# Altium PCB SensorFusionV1.2.PcbDoc (part 2 of 2)
Units mil, origin at the board's own origin, x right, y up, seen from the top; angles counter-clockwise.
Board outline 6000 x 4000 mil, 4 copper layers (Component Side, Ground Plane, Power Plane, Solder Side), stack 33.234 mil thick; 137 components, 117 nets, 497 pads, 789 vias.
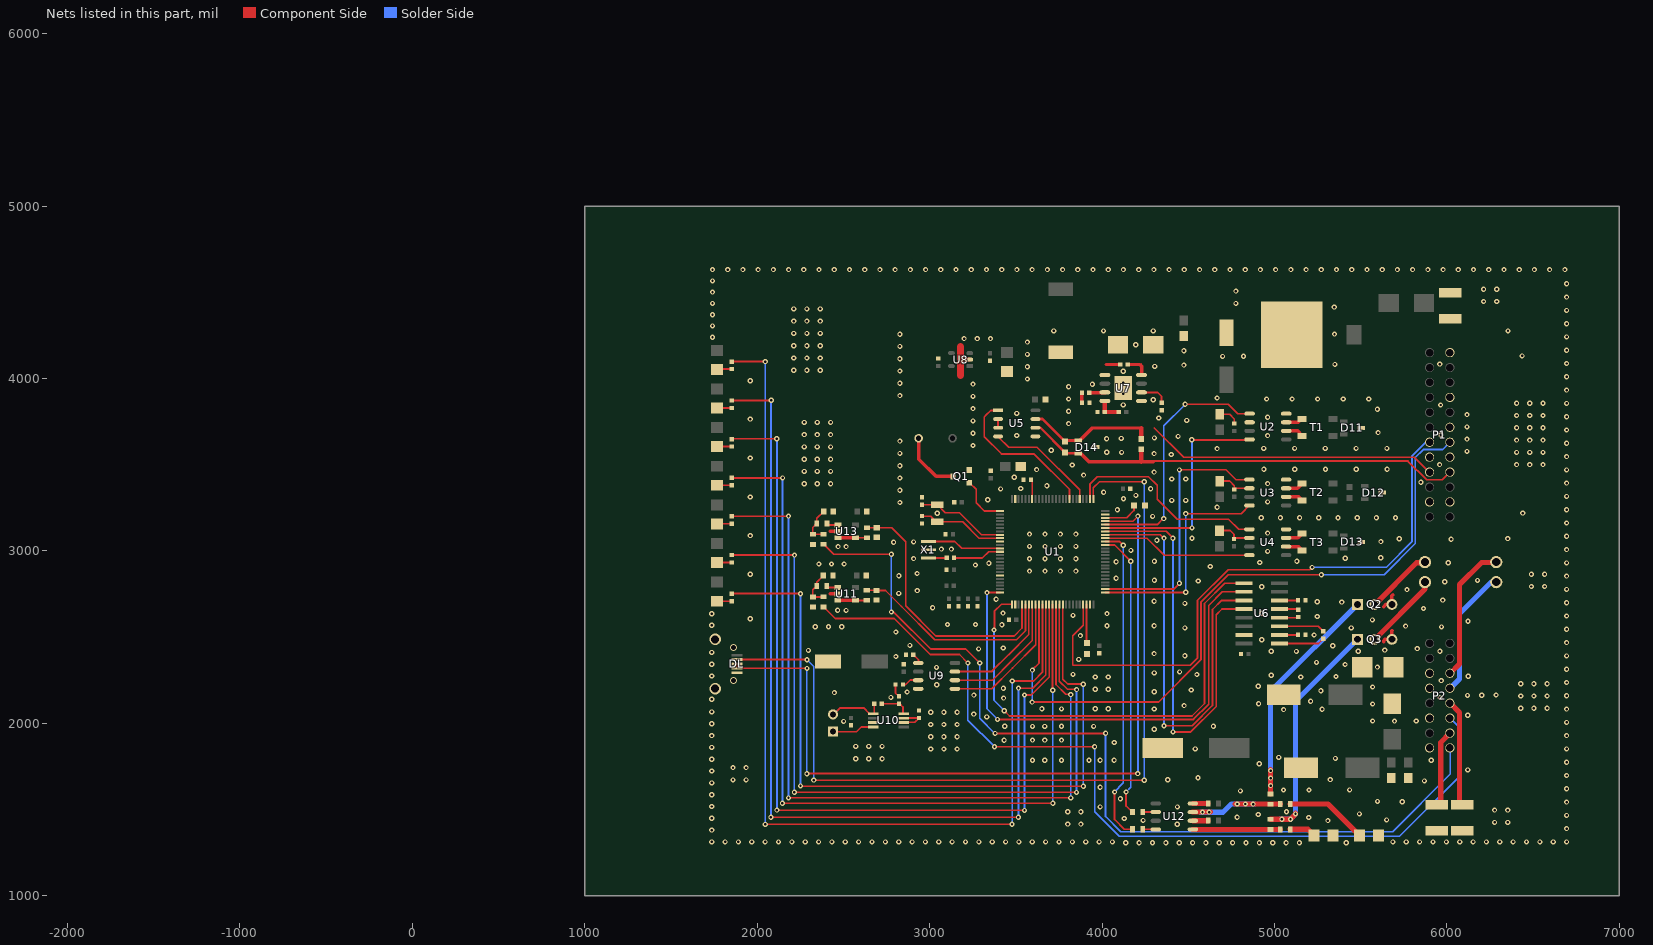
[diagram p4: the nets of this part, all layers, seen from the top]

## Via types
v1: diameter 30, hole 14, Component Side to Solder Side, tented both sides, 762 vias
v2: diameter 30, hole 14, Component Side to Solder Side, 13 vias
v3: diameter 125.98, hole 125.98, Component Side to Solder Side, 4 vias
v4: diameter 50, hole 28, Component Side to Solder Side, tented both sides, 3 vias
v5: diameter 50, hole 28, Component Side to Solder Side, 3 vias
v6: diameter 39.37, hole 29.53, Component Side to Solder Side, 2 vias
v7: diameter 66.93, hole 47.24, Component Side to Solder Side, 2 vias

## Nets (pads, with @x,y where several pads share a name; then routed paths per layer and width w, separated by ;. In a path a pad name is that pad's centre, name@x,y a point inside that pad or via, vN(x,y) a via of type N, cw(c..) or ccw(c..) an arc to the next point about the centre after c; other vN are vias at no path point) (continued)
GND: C1.1 C2.1 C3.1 C4.1 C5.1 C6.1 C7.1 C8.1 C9.1 C10.1 C11.1 C12.2 C13.2 C14.2 C15.2 C16.2 C17.2 C18.2 C19.1 C20.1 C21.1 C22.1 C23.1 C24.1 C25.1 C26.1 C27.1 C28.1 C29.2 C31.2 C32.2 C33.1 C34.1 C35.1 C37.1 C38.1 C39.1 C40.1 C41.1 C42.1 C43.2 C46.2 C47.1 C48.2 C49.2 C51.2 C52.2 D7.2 D8.2 D10.1 D11.3 D12.3 D13.3 D14.3 D16.2 D21.1 DL.5 F1.2 F2.2 F4.2 P1.2 P1.5 P1.16 P1.18 P1.20 P1.23 P2.6 P2.8 Q1.3 Q2.3 Q3.3 R1.2 R14.1 R15.1 R16.1 R20.1 R28.1 U1.10 U1.20 U1.27 U1.49 U1.74 U1.99 U2.2 U2.8 U3.2 U3.8 U4.2 U4.8 U5.5 U6.15 U7.5 U7.9 U8.2 U9.8 U10.7 U11.2 U13.2 X1.2 | length 1032.1
  Component Side w10: C25.1@4681.62,3118.31 4743.62,3118.31 4765.44,3096.49 C24.1@4765.44,3069.44 ; C23.1@4691.41,3405.98 4739.81,3405.98 4767.23,3378.56 C22.1@4767.23,3356.42 ; C21.1@4695.37,3792.7 4739.86,3792.7 4767.38,3765.18 C20.1@4767.38,3739.09 ; C22.1@4771.44,3363.41 U3.2@4854.89,3363.41 ; C24.1@4773.74,3075.38 U4.2@4854.39,3075.38
  Component Side w20: 2423.05,3112.67 2423.73,3113.35 U13.2@2468.58,3113.35 ; 2424.56,2750.79 2424.75,2750.6 U11.2@2467.58,2750.6 ; 5632.65,2473.01 5632.65,2479.31 5640.65,2487.31 Q3.3@5681.15,2487.31 5681.15,2537.66 5682.19,2538.7 ; 5632.65,2676.24 5646.57,2690.17 Q2.3@5681.15,2690.17 5681.15,2739.01 5687.21,2745.07
  Component Side w22: 3182.88,4109.75 U8.2@3232.92,4109.75
  Component Side w40: 3179.14,4017.3 3179.14,4185.98
  other v1: 4137.55,1307.35 4215.01,1307.35 4292.48,1307.35 4369.94,1307.35 4447.4,1307.35 4524.86,1307.35 4602.32,1307.35 4679.78,1307.35 4757.25,1307.35 4834.71,1307.35 4912.17,1307.35 4989.63,1307.35 5067.09,1307.35 5144.56,1307.35 5416.19,1307.35 1736.23,1312.35 1813.69,1312.35 1891.16,1312.35 1968.62,1312.35 2046.08,1312.35 2123.54,1312.35 2201,1312.35 2278.47,1312.35 2355.93,1312.35 2433.39,1312.35 2510.85,1312.35 2588.31,1312.35 2665.78,1312.35 2743.24,1312.35 2820.7,1312.35 2898.16,1312.35 2975.62,1312.35 3053.08,1312.35 3130.55,1312.35 3208.01,1312.35 3285.47,1312.35 3362.93,1312.35 3440.39,1312.35 3517.86,1312.35 3595.32,1312.35 3672.78,1312.35 3750.24,1312.35 3827.7,1312.35 3905.17,1312.35 3982.63,1312.35 4060.09,1312.35 5686.79,1312.35 5764.25,1312.35 5841.71,1312.35 5919.17,1312.35 5996.64,1312.35 6074.1,1312.35 6151.56,1312.35 6229.02,1312.35 6306.48,1312.35 6383.95,1312.35 6461.41,1312.35 6538.87,1312.35 6616.33,1312.35 6693.79,1312.35 1736.23,1380.89 6693.79,1389.42 4436.01,1414.77 3801.17,1416.14 3877.37,1416.14 6276.81,1426.08 6353.01,1426.08 5309.56,1436.42 4238.4,1437.68 5650.1,1440.3 4129.1,1448.47 1736.23,1449.43 5198.99,1454.39 4783.06,1456.05 6693.79,1466.49 4905.94,1471.31 5492.44,1474.92 3801.17,1487.31 3877.37,1487.31 5069.89,1487.33 6276.81,1497.25 6353.01,1497.25 3988.55,1515.71 4437.29,1515.73 1736.23,1517.98 6693.79,1543.56 5740.76,1545.73 5597.25,1547.34 4106.59,1563.05 1736.23,1586.52 4802.6,1608.67 5052.3,1613.7 5200.26,1613.73 5435.5,1614.25 6693.79,1620.63 3988.77,1630.02 1736.23,1655.06 5869.6,1666.58 1859.6,1672.13 1935.79,1672.13 4381.2,1673.33 5323.82,1673.6 4556.22,1684.48 6693.79,1697.7 1736.23,1723.6 6120.82,1729.91 1859.6,1743.31 1935.79,1743.31 4911.21,1766.31 6693.79,1774.77 3596.75,1786.29 3667.43,1786.29 3764.94,1786.29 3924.08,1786.29 3988.37,1786.29 4069.79,1786 5908.89,1785.81 1736.23,1792.15 2571.3,1795.01 2647.49,1795.01 2724.34,1795.01 5353.5,1796.99 5024.67,1802.86 3006.56,1851.37 3082.75,1851.37 3159.59,1851.37 4540.62,1851.7 6693.79,1851.83 1736.23,1860.69 2571.3,1866.19 2647.49,1866.19 2724.34,1866.19 4070.66,1889.02 3431.76,1902.25 3596.75,1903.28 3667.43,1903.28 3764.94,1902.95 3006.56,1922.55 3082.75,1922.55 3159.59,1922.55 1736.23,1929.23 6693.79,1928.9 4302.66,1965.98 3596.75,1982.48 3667.43,1982.48 3951.33,1982.3 3435.67,1983.32 3764.94,1983.34 4645.41,1983.25 3006.56,1993.72 3082.75,1993.72 3159.59,1993.72 1736.23,1997.77 6693.79,2005.97 2501.47,2011.39 5695.81,2013.01 5568.79,2013.62 5822.26,2013.62 3331.74,2037.91 6120.58,2046.87 3256.36,2053.58 3006.56,2064.9 3082.75,2064.9 3159.59,2064.9 1736.23,2066.32 5053.19,2079.7 5276.22,2081.91 6693.79,2083.04 3764.94,2083.83 4302.37,2083.57 3651.14,2084.66 3960.16,2085.23 4036.35,2085.23 6427.95,2087.34 6504.14,2087.34 6580.98,2087.34 4475.72,2103.22 5568.79,2112.32 4908.22,2114.11 5209.34,2128.07 1736.23,2139.86 3429.19,2146.28 5960.32,2149.39 2775.35,2150.7 6427.95,2158.52 6504.14,2158.52 6580.98,2158.52 6693.79,2160.11 6119.41,2162.35 3256.59,2163.76 6201.89,2163.53 6285.56,2164.71 2447.51,2178.51 2869.13,2182.04 4302.91,2183.85 5269.31,2189.14 4517.54,2193.54 3960.16,2197.96 4036.35,2197.96 3428.01,2203.68 5568.79,2211.02 4905.94,2215.34 3041.8,2223.63 6427.95,2229.69 6504.14,2229.69 6580.98,2229.69 6693.79,2237.18 5967.39,2248.38 3960.16,2269.14 4036.35,2269.14 5151.98,2268.82 5356.92,2272.06 6124.12,2273.12 1736.23,2274.59 4981.51,2279.21 4550.24,2283.42 3831.75,2283.72 4302.59,2292.95 4449.81,2298.36 6693.79,2314.25 3040.1,2324.63 5597.05,2326.13 5409.23,2341.25 1736.23,2343.13 5243.5,2353.77 3864.42,2371.15 2804.63,2387.77 6693.79,2391.32 4480.34,2392.48 4301.96,2404.46 1736.23,2411.68 5127.37,2417.57 5959.14,2418.07 4981.08,2418.67 5486.03,2418.76 2296.94,2423.22 5639.72,2425.01 3283.99,2431.89 5828.28,2433.92 3427.49,2436.94 5337.49,2449.9 2885.94,2452.19 6693.79,2468.39 4926.52,2485.08 3874.62,2508.82 5230.02,2512.31 2804.63,2530.13 6693.79,2545.46 4480.34,2553.79 5445.66,2554.06 5968.47,2559.24 2337.14,2560.07 2413.34,2560.07 2490.18,2560.07 5760.16,2564.08 4028.69,2565.77 4301.96,2565.77 1736.23,2568.95 3418.95,2571.72 3103.7,2573.39 3265.96,2573.39 6122.15,2592.24 5567.86,2600.14 1959.32,2606.38 5247.78,2619.95 6693.79,2622.53 3831.75,2626.51 1736.23,2635.54 4028.69,2636.94 3425.58,2639.49 4926.52,2638.6 2515.39,2654.96 2466.68,2655.91 5864.17,2666.43 3017.63,2670.35 4480.34,2696.14 6693.79,2699.6 5390.58,2703.3 5247.78,2705.32 4301.96,2708.12 5976.32,2714.62 3385.85,2719.9 2820.74,2753.57 2928.58,2770.28 5768.4,2775.85 6693.79,2776.67 4926.52,2792.11 6489.61,2793.8 6566.45,2793.8 5987.24,2821.64 4558.26,2825.81 6177.49,2829.34 4303.88,2829.64 4081.47,2841.61 6693.79,2853.74 2822.17,2856.15 1959.32,2864.94 6489.61,2864.98 6566.45,2864.98 2927.59,2869.22 3579.24,2882.9 3668.92,2882.9 3758.6,2882.9 3848.29,2882.9 4627.44,2909.67 3265.71,2918.39 2357.65,2924.15 2430.77,2924.15 2503.9,2924.15 3344.08,2928.19 6693.79,2930.81 6007.99,2931.92 4914.66,2933.09 4081.21,2937.78 5129.87,2939.91 4303.47,2940.63 2907.08,2955.44 3579.24,2954.58 3668.92,2954.58 3758.6,2954.58 3848.29,2954.58 5410.45,2957.56 5616.25,2960.52 4960.3,2997.39 4166.95,3003.05 6693.79,3007.88 3068.1,3010.91 3126.22,3010.91 2469.53,3024.87 2515.39,3024.96 3579.24,3026.26 3668.92,3026.26 3758.6,3026.26 3848.29,3026.26 2791.31,3050.44 2907.08,3052.69 5617.44,3054.27 4317.73,3061.86 6024.37,3067.33 5723.94,3071.01 6353.05,3071.7 4521.5,3073.65 6693.79,3084.95 1959.32,3088.97 3579.24,3097.94 3668.92,3097.94 3758.6,3097.94 3848.29,3097.94 4960.3,3103.45 6693.79,3162.02 4923.13,3192.71 5034.4,3192.71 5145.67,3192.71 5256.94,3192.71 5368.21,3192.71 5479.49,3192.71 5590.76,3192.71 5702.03,3192.71 4292.87,3200.45 3043.82,3218.87 6439.31,3219.11 4089.04,3239.23 6693.79,3239.09 4667.46,3253.59 2827.5,3280.88 4960.3,3284.51 4403.79,3293.47 4485.03,3293.47 3337.44,3296.55 4124.33,3302.76 1959.32,3313.01 6693.79,3316.16 4196.49,3322.37 4008.8,3340.31 2827.5,3352.05 3411.32,3359.67 4281.65,3360.68 3528.53,3361.88 3679.84,3377.66 2272.52,3389.82 2348.72,3389.82 2425.56,3389.82 4960.3,3390.64 6693.79,3393.23 5849.05,3398.57 4403.79,3417.27 4485.03,3417.27 2827.5,3423.23 3491.26,3427.49 3892.84,3439.65 4301.86,3457.3 2272.52,3460.99 2348.72,3460.99 2425.56,3460.99 6693.79,3470.3 3620.14,3471.48 4938.93,3473.65 5117.44,3473.65 5295.95,3473.65 5474.46,3473.65 5652.97,3473.65 2827.5,3494.41 3827.41,3498.38 5957.23,3500.65 6404,3500.59 6480.19,3500.59 6557.03,3500.59 2272.52,3532.17 2348.72,3532.17 2425.56,3532.17 1959.32,3538.94 6693.79,3547.37 4401.64,3559.52 4301.72,3564.55 2827.5,3565.58 4027.32,3572.33 4113.2,3571.72 6404,3571.76 6480.19,3571.76 6557.03,3571.76 6116.62,3577.17 3704.98,3584.41 4667.4,3593.79 4937.84,3594.84 5116.35,3594.84 5294.86,3594.84 5473.37,3594.84 5651.88,3594.84 2272.52,3603.34 2348.72,3603.34 2425.56,3603.34 3251.36,3611.71 6693.79,3624.44 2827.5,3636.76 6404,3642.94 6480.19,3642.94 6557.03,3642.94 6116.62,3648.34 4026.1,3650.9 4111.38,3652.73 4303.61,3655.68 4441.3,3664.07 3505,3669.43 4960.3,3669.11 5964.25,3674.31 2272.52,3674.52 2348.72,3674.52 2425.56,3674.52 3251.36,3682.89 5600.76,3686.54 6693.79,3701.51 6404,3714.11 6480.19,3714.11 6557.03,3714.11 6116.62,3719.52 3806.21,3738.75 2272.52,3745.7 2348.72,3745.7 2425.56,3745.7 3251.36,3754.07 4491.03,3757.4 1959.32,3764.87 4328.57,3771.14 4960.3,3775.17 6693.79,3778.57 6404,3785.29 6480.19,3785.29 6557.03,3785.29 6116.62,3790.7 3505,3797.76 3806.21,3809.92 5596.93,3821.58 3251.36,3825.24 4122.92,3847.03 5963.46,3846.57 6404,3856.47 6480.19,3856.47 6557.03,3856.47 6693.79,3855.64 4296.88,3877.06 3806.21,3881.1 4954.12,3881.32 5102.26,3881.32 5250.4,3881.32 5398.53,3881.32 5546.67,3881.32 4667.17,3886.82 3251.36,3896.42 2827.5,3901.19 6693.79,3932.71 3806.21,3952.28 3943.78,3967.14 3251.36,3967.59 2827.5,3972.37 1959.32,3987 3567.24,3997.4 6693.79,4009.78 4122.92,4041.66 2827.5,4043.54 2212.34,4047.91 2288.54,4047.91 2365.38,4047.91 3567.24,4068.58 4306.09,4070.5 4474.64,4077.62 5350.51,4081.54 5958.63,4083.52 6693.79,4086.85 2827.5,4114.72 2212.34,4119.09 2288.54,4119.09 2365.38,4119.09 4699.33,4128.5 4820.51,4129.14 6436.04,4130.9 3567.24,4139.75 4474.64,4160.63 6693.79,4163.92 2827.5,4185.9 2212.34,4190.26 2288.54,4190.26 2365.38,4190.26 4195.6,4195.6 3567.24,4210.93 3199.85,4231.4 3276.04,4231.4 3352.88,4231.4 1740.83,4239.6 6693.79,4240.99 2827.5,4257.07 5347.8,4257.41 2212.34,4261.44 2288.54,4261.44 2365.38,4261.44 3720.29,4276.45 4008.46,4276.45 4296.63,4275.91 6354.14,4276.13 1740.83,4304.93 6693.79,4318.06 2212.34,4332.62 2288.54,4332.62 2365.38,4332.62 1740.83,4370.25 6693.79,4395.13 2212.34,4403.79 2288.54,4403.79 2365.38,4403.79 5346.45,4414.34 1740.83,4435.58 4776.4,4435.51 6212.47,4446.61 6289.31,4446.61 6693.79,4472.2 1740.83,4500.9 4776.4,4506.68 6212.47,4517.79 6289.31,4517.79 6693.79,4549.27 1740.83,4566.23 1740.83,4631.55 1829.1,4631.55 1917.37,4631.55 2005.63,4631.55 2093.9,4631.55 2182.17,4631.55 2270.44,4631.55 2358.71,4631.55 2446.98,4631.55 2535.25,4631.55 2623.52,4631.55 2711.79,4631.55 2800.06,4631.55 2888.33,4631.55 2976.6,4631.55 3064.87,4631.55 3153.14,4631.55 3241.41,4631.55 3329.68,4631.55 3417.95,4631.55 3506.22,4631.55 3594.49,4631.55 3682.76,4631.55 3771.03,4631.55 3859.3,4631.55 3947.57,4631.55 4035.84,4631.55 4124.1,4631.55 4212.37,4631.55 4300.64,4631.55 4388.91,4631.55 4477.18,4631.55 4565.45,4631.55 4653.72,4631.55 4741.99,4631.55 4830.26,4631.55 4918.53,4631.55 5006.8,4631.55 5095.07,4631.55 5183.34,4631.55 5271.61,4631.55 5359.88,4631.55 5448.15,4631.55 5536.42,4631.55 5624.69,4631.55 5712.96,4631.55 5801.23,4631.55 5889.5,4631.55 5977.77,4631.55 6066.04,4631.55 6154.31,4631.55 6242.58,4631.55 6330.85,4631.55 6419.11,4631.55 6507.38,4631.55 6595.65,4631.55 6683.92,4631.55
  other v2: 4122.92,3911.91 4122.92,3976.78
  other v6: 1861.86,2249.09 1861.86,2440.04
  other v7: 1756.35,2201.85 1756.35,2487.28
NetBUZ1_2: BUZ1.2 Q1.1 | length 358.8
  Component Side w20: BUZ1.2@2936.28,3652.75 2936.28,3532.85 3037.04,3432.09 Q1.1@3133.48,3432.09
NetC10_2: C10.2 U1.48 | length 218.4
  Component Side w10: C10.2@3910.04,2471.78 U1.48@3910.04,2690.18
NetC11_2: C11.2 U1.73 | length 211.9
  Component Side w10: U1.73@4018.31,3192.15 4142.2,3192.15 4185.17,3235.12 C11.2@4185.17,3262.37
NetC15_1: C15.1 U1.8 X2.2 | length 523.7
  Component Side w10: C15.1@2956.19,3268.22 X2.2@3044.01,3268.22 ; X2.2@3045.74,3266.73 3090.97,3221.49 3173.27,3221.49 3301.04,3093.72 U1.8@3409.95,3093.72
NetC16_1: C16.1 U1.9 X2.1 | length 502.6
  Component Side w10: C16.1@2955.51,3201.97 3005.51,3201.97 3037.38,3170.1 X2.1@3041.17,3170.1 ; X2.1@3046.19,3165.99 3049.47,3169.26 3191.41,3169.26 3286.63,3074.04 U1.9@3409.13,3074.04
NetC27_2: C27.2 R17.2 R18.1 R20.2 | length 213.8
  Component Side w10: R20.2@2322.81,2732.61 2322.81,2774.98 R18.1@2344.71,2796.87 ; R20.2@2323,2733.53 2384.94,2733.53 R17.2@2385.61,2734.2 ; R18.1@2345.45,2796.69 2345.45,2818.44 C27.2@2384.36,2857.36
  Component Side w20: R20.2@2323.13,2733.61 R20.2@2323.71,2734.2
NetC28_2: C28.2 R19.2 U1.30 | length 1220.9
  Component Side w10: R19.2@2635.63,2772.5 2691.84,2772.5 C28.2@2692.9,2771.44 ; C28.2@2692.57,2770.53 2744.22,2770.53 2837.16,2677.59 ; 2837.16,2677.66 3029.12,2485.71 3449.19,2485.71 ; 3441.29,2485.7 3503.95,2485.7 3555.71,2537.46 U1.30@3555.71,2690.18
NetC30_1: C30.1 U7.8 | length 139.6
  Component Side w20: C30.1@4148.43,4081.31 4219.95,4081.31 4229.11,4072.15 4229.11,4027.33 U7.8@4236.41,4020.03
NetC30_2: C30.2 D10.2 L2.2 U7.1 | length 80.3
  Component Side w20: 4025.14,4081.31 C30.2@4105.42,4081.31
NetC36_1: C36.1 U7.3 | length 83.9
  Component Side w20: C36.1@3934.01,3918.53 U7.3@4017.88,3918.53
NetC36_2: C36.2 R15.2 | length 57.3
  Component Side w20: R15.2@3883.22,3860.3 C36.2@3883.22,3917.59
NetC39_2: C39.2 R25.2 R26.1 R28.2 | length 220.8
  Component Side w10: R28.2@2322.48,3095.49 2322.48,3136.34 R26.1@2345.71,3159.57 ; R28.2@2323,3096.53 R25.2@2384.63,3096.53 ; 2345.59,3096.59 2345.71,3096.71 ; R26.1@2346.22,3159.36 2346.22,3189.25 C39.2@2385.36,3228.39
NetC43_1: C43.1 U6.2 | length 108.6
  Component Side w10: U6.2@5028.61,2513.05 C43.1@5137.22,2513.05
NetC44_1: C44.1 U6.3 | length 266.1
  Component Side w10: U6.3@5028.61,2563.05 5253.44,2563.05 ; 5253.8,2563.05 C44.1@5282.96,2533.89
NetC44_2: C44.2 U6.1 | length 265.4
  Component Side w10: U6.1@5028.61,2463.05 5254.54,2463.05 ; 5254.99,2463.05 C44.2@5282.87,2490.93
NetC45_1: C45.1 U6.5 | length 110.5
  Component Side w10: U6.5@5028.61,2663.05 5134.42,2663.05 C45.1@5137.76,2659.71
NetC45_2: C45.2 U6.4 | length 110.9
  Component Side w10: U6.4@5028.61,2613.05 5134.81,2613.05 C45.2@5138.11,2616.35
NetC46_1: C46.1 U6.6 | length 108.2
  Component Side w10: U6.6@5028.61,2713.05 5136.1,2713.05 C46.1@5136.62,2713.57
NetC47_2: C47.2 R27.2 U1.29 | length 1539.9
  Component Side w10: R27.2@2636.63,3134.95 2692.86,3134.95 C47.2@2693.63,3134.18 ; C47.2@2693.57,3134.07 2781.13,3134.07 2861.02,3054.17 ; 2861.02,3053.97 2861.02,2682.09 3036.93,2506.18 3489.23,2506.18 3535.99,2552.94 3535.99,2638.09 ; 3536.03,2632.4 U1.29@3536.03,2690.18
NetC50_1: C50.1 R11.1 | length 78.1
  Component Side w10: C50.1@2802.19,2225.39 2802.19,2175.66 R11.1@2822.23,2155.61
NetC50_2: C50.2 U9.7 | length 100.7
  Component Side w10: C50.2@2845.2,2225.39 2861.73,2225.39 2888.09,2251.74 U9.7@2935.02,2251.74
NetC51_1: C51.1 U10.2 U10.3 | length 176.3
  Component Side w10: U10.2@2856.33,2006.03 2913.76,2006.03 C51.1@2939.14,2031.42 ; U10.3@2856.33,2031.62 C51.1@2939.31,2031.62
NetC52_1: C52.1 U9.5 | length 60
  Component Side w10: C52.1@2905.99,2397.64 2935.39,2368.23 U9.5@2935.39,2349.79
NetD0_2: D0.2 R3.2 | length 86.9
  Component Side w10: D0.2@1765.55,4054.82 R3.2@1852.48,4054.82
NetD1_2: D1.2 R4.2 | length 90.8
  Component Side w10: D1.2@1761.71,3829.21 R4.2@1852.48,3829.21
NetD2_2: D2.2 R5.2 | length 67.8
  Component Side w10: D2.2@1784.67,3605.35 R5.2@1852.48,3605.35
NetD3_2: D3.2 R6.2 | length 74.3
  Component Side w10: D3.2@1778.13,3380.79 R6.2@1852.48,3380.79
NetD4_2: D4.2 R7.2 | length 83.3
  Component Side w10: D4.2@1769.19,3157.38 R7.2@1852.48,3157.38
NetD5_2: D5.2 R8.2 | length 78.6
  Component Side w10: D5.2@1773.91,2933.3 R8.2@1852.48,2933.3
NetD6_2: D6.2 R9.2 | length 81.6
  Component Side w10: D6.2@1770.86,2708.36 R9.2@1852.48,2708.36
NetD7_1: D7.1 R24.1 | length 476.1
  Component Side w30: R24.1@5091.78,1532.32 5310.02,1532.32 D7.1@5492.33,1350.02
NetD8_1: D8.1 R32.1 | length 153.3
  Component Side w30: R32.1@5091.91,1385.63 5194.54,1385.63 D8.1@5230.38,1349.79
NetD9_2: D9.2 D16.1 P2.3 P2.4
NetF1_1: F1.1 P1.13
NetF2_1: F2.1 P2.12 | length 607.6
  Component Side w30: P2.12@6019.28,2117.55 6073.34,2063.5 F2.1@6073.34,1532.35
NetF3_1: F3.1 Q2.2 | length 390.2
  Component Side w30: Q2.2@5582.92,2690.27 5824.45,2931.81 F3.1@5873.09,2931.81
NetF3_2: F3.2 P2.14 | length 802.8
  Component Side w30: P2.14@6018.93,2290.42 6072.63,2344.11 6072.63,2804.69 6201.56,2933.62 F3.2@6285.47,2933.62
NetF4_1: F4.1 P2.10 | length 434.8
  Component Side w30: F4.1@5963.79,1531.4 5963.79,1889.72 P2.10@6017.87,1943.8
NetF5_1: F5.1 Q3.2 | length 451.7
  Component Side w30: Q3.2@5581.22,2487.23 5873.09,2779.11 F5.1@5873.09,2818.01
NetF5_2: F5.2 P2.13 | length 744.5
  Solder Side w30: P2.13@6018.12,2202.66 6072.87,2257.4 6072.87,2636.09 6254.55,2817.78 F5.2@6286.02,2817.78
NetP1_6: P1.6 U1.47 | length 3467.6
  Component Side w10: 3829.54,2339.02 3829.54,2508.49 ; 3829.54,2509.04 3890.36,2569.86 U1.47@3890.36,2690.18 ; 3831.29,2337.42 4512.42,2337.42 4553,2378 ; 4552.91,2378.41 4552.91,2712.3 4731.85,2891.25 5206.06,2891.25 v1@5219.94,2905.13
  Solder Side w10: v1@5217.84,2905.46 5649.51,2905.46 5797,3052.95 5797,3550 5875.38,3628.38 P1.6@5899.72,3628.38
  other v1: 5218.32,2904.81
NetP1_19: P1.19 U1.34 | length 4118.5
  Component Side w10: v1(3594.5,2123.58) 4328.33,2123.58 4573.23,2368.48 4573.23,2703.23 4731.89,2861.89 v1@5272.17,2861.89 ; v1@3596.15,2310.97 3634.45,2349.27 U1.34@3634.45,2690.18
  Solder Side w10: v1@3595.71,2120.08 v1(3595.71,2309.28) ; v1@5272.02,2861.69 5635.61,2861.69 5817,3043.08 5817,3541.57 5863.26,3587.84 5974.65,3587.84 P1.19@6016.55,3629.74
  other v1: 5272.15,2861.71
NetP2_9: P2.9 R25.1 | length 5285.5
  Component Side w10: R25.1@2385.33,3038.31 2443.58,2980.06 v1@2779.74,2980.06 ; v1@2778.08,2645.05 2792.52,2645.05 3006.07,2431.5 3210.32,2431.17 v1@3291.47,2349.76 ; v1(3379.68,1941.92) v1@4020.46,1941.92
  Solder Side w10: v1@2777.46,2980.05 2778.27,2979.24 v1@2778.27,2645.64 ; v1@3291.09,2350.92 3291.09,2028.76 v1@3379.21,1940.64 ; v1(4020.46,1942.53) 4020.46,1459.79 4107.96,1372.29 5685.02,1372.29 6019.21,1706.48 P2.9@6019.21,1859.37
  other v1: 3291.09,2350.26 2778.11,2646.06 2778.4,2980.66
NetP2_11: P2.11 R17.1 | length 5163.7
  Component Side w10: R17.1@2385.33,2675.11 2452.06,2608.38 2794.95,2608.38 3004.1,2399.23 3172.96,2399.23 v1@3222.14,2350.05 ; v1(3376.45,1863.98) v1@3956.93,1863.98
  Solder Side w10: v1@3221.79,2350.48 3221.79,2018.75 v1@3376.82,1863.72 ; v1(3957.01,1864.09) 3957.01,1486.79 4098.82,1344.98 4168.23,1344.98 ; 4164.99,1344.95 5725.33,1344.95 6074.67,1694.29 6074.67,1975.06 P2.11@6019.22,2030.5
  other v1: 3221.79,2350.25
NetQ1_2: Q1.2 U1.1 | length 285.3
  Component Side w10: Q1.2@3234.26,3392.82 3270.12,3356.96 3270.12,3278.66 3317.26,3231.52 U1.1@3406.88,3231.52
NetQ2_1: Q2.1 R23.2 | length 1408.5
  Component Side w30: R23.2@4977.58,1590.42 v1@4977.58,1733.42
  Solder Side w30: v1@4977.66,1633.19 4977.66,2186.68 Q2.1@5481.15,2690.17
  other v1: 4977.42,1639.21 4977.73,1682.5 4977.73,1725.79
NetQ3_1: Q3.1 R31.2 | length 1426.9
  Component Side w30: R31.2@4977.58,1444.11 5093.39,1444.11 5122.19,1472.91 v1@5122.19,1479.3
  Solder Side w30: v1@5033.07,1444.14 5093.14,1444.14 5122.03,1473.03 5122.03,2128.19 Q3.1@5481.15,2487.31
  other v1: 5042.76,1444.16 5092.92,1444.29 5121.91,1475.35
NetR1_1: R1.1 U1.94 | length 113.7
  Component Side w10: R1.1@3587.11,3410.86 3595.08,3402.89 U1.94@3595.08,3300.42
NetR2_1: R2.1 X1.1 | length 105.7
  Component Side w10: X1.1@2992.46,2959.7 3096.84,2959.7 R2.1@3097.76,2960.62
NetR2_2: R2.2 U1.13 | length 283.1
  Component Side w10: R2.2@3140.26,2959.17 3305.76,2959.17 3341.89,2995.3 U1.13@3408.42,2995.3
NetR3_1: R3.1 U1.35 | length 5728.8
  Component Side w10: R3.1@1855.77,4098.39 v1@2046.35,4098.39 ; v1@2044.91,1414.64 v1@3478.37,1414.64 ; v1@3478.66,2245.6 3603.41,2245.6 3654.14,2296.34 U1.35@3654.14,2690.18
  Solder Side w10: v1(2046.44,1414.15) v1@2046.44,4098.75 ; v1@3479.01,1415.66 v1@3479.01,2245.44
  other v1: 3477.62,1414.64 3479.01,2245.54 2046.36,4098.23
NetR4_1: R4.1 U1.36 | length 5426.4
  Component Side w10: R4.1@1853.05,3872.7 v1@2080.89,3872.7 ; v1@2078.91,1455.18 v1@3516.01,1455.18 ; v1@3515.49,2203.96 3597.31,2203.96 3673.82,2280.47 U1.36@3673.82,2690.18
  Solder Side w10: v1(2079.68,1455.36) v1@2079.68,3873.35 ; v1@3515.3,1461.02 v1@3515.3,2204.79
  other v1: 3515.05,1455.18 3515.3,2204.33 2081.17,3873.95
NetR5_1: R5.1 U1.37 | length 5131.3
  Component Side w10: R5.1@1850.7,3651.09 v1@2114.7,3651.09 ; v1@2113.61,1495.49 v1@3551.15,1495.49 ; v1@3549.72,2164.38 3589.05,2164.38 3693.51,2268.83 U1.37@3693.51,2690.18
  Solder Side w10: v1(2114.31,1496.82) v1@2114.31,3650.96 ; v1@3550.1,1497.16 v1@3550.1,2164.38
  other v1: 3550.18,1495.49 3550.1,2164.75 2113.57,3650.43
NetR6_1: R6.1 U1.38 | length 4896.3
  Component Side w10: R6.1@1856.75,3423.25 v1@2148.78,3423.25 ; v1@2144.89,1537.27 v1(3714.59,1537.27) ; v1@3713.19,2195.11 U1.38@3713.19,2690.18
  Solder Side w10: v1(2146.28,1537.04) v1@2146.28,3423.49 ; v1@3714.15,1538.79 v1(3714.15,2191.78)
  other v1: 2147.36,3423.52
NetR7_1: R7.1 U1.39 | length 4771.9
  Component Side w10: R7.1@1851.39,3201.14 v1@2182.49,3201.14 ; v1@2180.05,1568.07 v1(3818.9,1568.07) ; U1.39@3732.88,2690.18 3732.88,2225.54 3789.81,2168.61 v1@3814.42,2168.61
  Solder Side w10: v1(2181.47,1568.09) v1@2181.47,3201.76 ; v1@3818.02,1568.04 v1(3818.02,2166.53)
  other v1: 2181.37,3202.26
NetR8_1: R8.1 U1.40 | length 4532.6
  Component Side w10: R8.1@1857.35,2975.84 v1@2217.26,2975.84 ; v1@2214.84,1599.82 v1(3851.89,1599.82) ; U1.40@3752.56,2690.18 3752.56,2244.25 3799.24,2197.57 v1@3854.26,2197.57
  Solder Side w10: v1(2215.61,1600.92) v1@2215.61,2975.72 ; v1@3852.41,1602.36 v1(3852.41,2196.2)
  other v1: 2216.49,2975.87
NetR9_1: R9.1 U1.41 | length 4303.8
  Component Side w10: R9.1@1858.94,2752.79 v1@2251.97,2752.79 ; v1@2250.28,1635.48 v1(3891.99,1635.48) ; U1.41@3772.25,2690.18 3772.25,2256.51 3800.78,2227.98 v1@3891.34,2227.98
  Solder Side w10: v1(2251.01,1637.22) v1@2251.01,2755.14 ; v1@3891.38,1640.44 v1(3891.38,2227)
  other v1: 2251.26,2752.22
NetR11_2: R11.2 R12.1 U10.4 | length 166
  Component Side w10: R12.1@2723.03,2113.43 2826.27,2113.43 2845.33,2094.37 U10.4@2845.33,2058.53
NetR12_2: R12.2 SPEAKER.2 U10.5 | length 313.7
  Component Side w10: SPEAKER.2@2443.39,2052.22 2480.82,2089.65 2617.17,2089.65 2651.26,2055.56 U10.5@2674.52,2055.56 ; U10.5@2679.16,2057.21 R12.2@2679.16,2110.19
NetR13_1: R13.1 R14.2 U7.4 | length 143.5
  Component Side w25: U7.4@4016.06,3868.59 4016.06,3805.92 4016.53,3805.45 R13.1@4096.68,3805.45
NetR16_2: R16.2 U7.6 | length 157.9
  Component Side w10: U7.6@4231.3,3918.53 4323,3918.53 4345.09,3896.44 R16.2@4345.09,3861.45
NetR18_2: R18.2 U11.1 | length 67.6
  Component Side w10: R18.2@2403.77,2796.87 2412.74,2787.9 U11.1@2467.64,2787.9
NetR19_1: R19.1 U11.3 U11.4 | length 168.3
  Component Side w10: U11.4@2569.55,2713.2 2634.85,2713.2 R19.1@2635.54,2712.5
  Component Side w20: U11.3@2467.58,2713.2 2569.45,2713.2 U11.4@2569.54,2713.1
NetR21_1: R21.1 U12.8 | length 87.6
  Component Side w30: U12.8@4527.41,1535.83 R21.1@4614.97,1535.83
NetR22_1: R22.1 U1.65 | length 1670.9
  Component Side w10: U1.65@4018.31,3034.67 4072.97,3034.67 v1@4166.76,2940.88 ; v1(4139.53,1602.04) 4139.53,1521.05 R22.1@4176.86,1483.72
  Solder Side w10: v1@4139.07,1602.09 4166.51,1629.53 v1(4166.51,2940.59)
NetR22_2: R22.2 U12.2 | length 75.8
  Component Side w10: R22.2@4235.77,1485.63 4311.35,1485.63 U12.2@4311.52,1485.45
NetR23_1: R23.1 R24.2 U12.7 | length 699.8
  Component Side w30: U12.7@4526.49,1485.45 4629.5,1485.45 v1@4629.7,1485.25 ; v1@4772.33,1532.36 R24.2@5034.34,1532.36
  Solder Side w30: v1@4572.64,1484.87 4702.15,1484.87 4749.78,1532.5 v1@4887.46,1532.5
  other v1: 4582.32,1485.22 4620.68,1485.22 4831.38,1532.36 4875.84,1532.17 4783.7,1532.5
NetR26_2: R26.2 U13.1 | length 67.9
  Component Side w10: R26.2@2404.77,3159.57 2413.58,3150.75 U13.1@2469.02,3150.75
NetR27_1: R27.1 U13.3 U13.4 | length 168.3
  Component Side w10: U13.4@2570.49,3075.94 U13.4@2570.67,3076.12 ; U13.4@2570.55,3075.94 2636.52,3075.94 R27.1@2636.64,3076.07
  Component Side w20: U13.3@2468.58,3075.94 U13.4@2570.49,3075.94
NetR29_1: R29.1 U12.6 | length 88.2
  Component Side w30: U12.6@4526.65,1435.66 R29.1@4614.83,1435.66
NetR30_1: R30.1 U1.66 | length 1854.3
  Component Side w10: U1.66@4018.31,3054.35 4102.38,3054.35 v1@4123.08,3033.66 ; v1(4072.57,1602.04) 4072.57,1443.03 4129.55,1386.04 4176.47,1386.04 R30.1@4176.82,1385.68
  Solder Side w10: v1@4070.03,1601.63 4123.25,1654.85 v1(4123.25,3033.5)
NetR30_2: R30.2 U12.4 | length 75.7
  Component Side w10: R30.2@4235.77,1385.68 4311.03,1385.68 U12.4@4311.36,1386.01
NetR31_1: R31.1 R32.2 U12.5 | length 509
  Component Side w30: U12.5@4526.49,1385.45 R32.2@5035.45,1385.45
NetSPEAKER_1: SPEAKER.1 U10.8 | length 241.2
  Component Side w10: SPEAKER.1@2442.94,1952.22 2576.05,1952.22 2603.14,1979.31 U10.8@2672.92,1979.31
NetT1_1: T1.1 U2.6 | length 100.7
  Component Side w20: U2.6@5068.14,3696.19 5133.72,3696.19 T1.1@5158.59,3671.32
NetT1_3: T1.3 U2.7 | length 82.4
  Component Side w20: U2.7@5068.14,3746.19 5137.35,3746.19 T1.3@5146.68,3755.53
NetT2_1: T2.1 U3.6 | length 87.5
  Component Side w20: U3.6@5067.48,3313.41 5140.73,3313.41 T2.1@5150.83,3303.31
NetT2_3: T2.3 U3.7 | length 102.8
  Component Side w20: U3.7@5067.48,3363.41 5133.44,3363.41 T2.3@5159.47,3389.43
NetT3_1: T3.1 U4.6 | length 91.5
  Component Side w20: U4.6@5066.98,3025.38 5139.99,3025.38 T3.1@5153.06,3012.31
NetT3_3: T3.3 U4.7 | length 94.5
  Component Side w20: U4.7@5066.98,3075.38 5136.32,3075.38 T3.3@5154.13,3093.19
NetU1_12: U1.12 X1.3 | length 426.3
  Component Side w10: X1.3@2998.02,3054.18 3146.21,3054.18 3146.28,3054.11 3146.94,3054.11 3186.06,3014.98 U1.12@3408.07,3014.98
NetU1_25: U1.25 U6.10 | length 2913.3
  Component Side w10: v1@3332.18,2759.08 U1.25@3408.07,2759.08 ; v1@3394.17,2023 4529.91,2023 4618.07,2111.15 4618.07,2683.71 4697.41,2763.05 U6.10@4827.94,2763.05
  Solder Side w10: v1(3332.86,2758.36) 3332.86,2084.36 v1@3394.86,2022.35
  other v1: 3393.84,2022.82
NetU1_26: U1.26 U6.9 | length 2781.8
  Component Side w10: v1@3375.64,2542.08 3375.64,2650.19 3416.72,2691.27 U1.26@3475.33,2691.27 ; v1@3433.33,2073 3463.33,2043 4521.63,2043 4594.15,2115.52 4594.15,2695.17 4712.03,2813.05 U6.9@4827.36,2813.05
  Solder Side w10: v1(3373.48,2541.75) 3373.48,2134.41 v1@3433.33,2074.56
  other v1: 3433.12,2073.29
NetU1_31: U1.31 U9.3 | length 698
  Component Side w10: U9.3@3145.54,2301.39 3361.23,2301.39 3459.99,2400.15 ; 3458.25,2398.4 3575.08,2515.24 U1.31@3575.08,2692.61
NetU1_32: U1.32 U9.2 | length 764
  Component Side w10: U9.2@3146,2250.57 3364.82,2250.57 3473.59,2359.34 ; U9.2@3146.51,2250.26 U9.2@3151.51,2255.26 ; 3471.4,2357.11 3595.08,2480.8 U1.32@3595.08,2690.18
NetU1_33: U1.33 U9.1 | length 816.9
  Component Side w10: U9.1@3146,2200.27 3359.99,2200.27 3480.89,2321.17 ; U9.1@3146.51,2200.26 U9.1@3151.51,2205.26 ; 3480.68,2320.84 3614.77,2454.92 U1.33@3614.77,2690.18
NetU1_51: U1.51 U3.4 | length 1312.6
  Component Side w10: U1.51@4019.41,2759.08 v1@4484.78,2759.08 ; v1@4484.14,3216.06 4807.28,3216.06 U3.4@4855.37,3264.14
  Solder Side w10: v1(4485.18,2760.79) v1@4485.18,3216.89
  other v1: 4485.01,3216.33
NetU1_52: U1.52 U3.1 | length 1534.3
  Component Side w10: U1.52@4017.78,2778.76 4415.2,2778.76 4447.1,2810.66 v1@4450.6,2810.66 ; v1@4448.85,3471.06 4718.18,3471.06 4718.32,3470.91 4719.04,3470.91 4776.54,3413.41 U3.1@4854.89,3413.41
  Solder Side w10: v1(4448.86,2812.2) v1@4448.86,3470.55
  other v1: 4448.43,3470.09
NetU1_67: U1.67 U4.4 | length 866.3
  Component Side w10: U1.67@4019.22,3074.04 4260.46,3074.04 4359.71,2974.78 4513.57,2974.78 ; 4512.39,2974.76 4775.53,2974.76 ; 4775.55,2974.78 U4.4@4843.22,2974.78
NetU1_68: U1.68 U6.11 | length 2533.8
  Component Side w10: U1.68@4018.77,3093.72 4337.22,3093.72 v1@4358.06,3072.89 ; v1(4359.47,1986.34) 4522.29,1986.34 4640.25,2104.3 4640.25,2660.11 4693.34,2713.2 4755.98,2713.2 ; 4754.85,2713.05 U6.11@4823.88,2713.05 U6.11@4829.66,2713.05
  Solder Side w10: v1@4359.33,1986.22 v1(4359.33,3074.16)
NetU1_69: U1.69 U6.12 | length 2559
  Component Side w10: U1.69@4017.2,3113.41 U1.69@4018.31,3113.41 4372.31,3113.41 v1@4411.9,3073.82 ; v1@4411.23,1950.92 4411.68,1950.46 4514.7,1950.46 4662.14,2097.9 4662.14,2629.73 4695.57,2663.15 U6.12@4827.9,2663.15
  Solder Side w10: v1@4411.24,1950.15 v1@4411.24,3074.49
  other v1: 4411.31,1950.85 4410.56,3073.99
NetU1_70: U1.70 U2.4 | length 1350.8
  Component Side w10: U1.70@4019.67,3133.09 v1@4524.12,3133.09 ; v1@4521.87,3643.74 U2.4@4856.76,3643.74
  Solder Side w10: v1@4521.78,3132.8 v1@4521.78,3644.26
  other v1: 4521.78,3133.8 4520.3,3644.36
NetU1_71: U1.71 U2.1 | length 1461.6
  Component Side w10: U1.71@4016.75,3152.78 4320.78,3152.78 v1@4353.78,3185.78 ; v1(4481.42,3850.41) 4732.26,3850.41 4787.02,3795.65 4851.92,3795.65 U2.1@4855.22,3798.95
  Solder Side w10: v1(4358.1,3187.83) 4358.1,3725.77 v1@4481.9,3849.56
NetU1_77: U1.77 U4.1 | length 1203.5
  Component Side w10: U1.77@3929.73,3300.42 3929.73,3388.42 3930.67,3389.36 ; U1.77@3929.92,3303.12 U1.77@3930.27,3302.78 ; 3931,3389.56 3972.42,3430.98 4269.36,3430.98 4319.47,3380.87 4319.47,3300.38 4435.71,3184.14 ; 4436.18,3183.85 4733.49,3183.85 4791.96,3125.38 U4.1@4854.39,3125.38
NetU1_80: U1.80 U5.4 | length 656.8
  Component Side w10: U5.4@3399,3665.2 3399,3661.15 3458.07,3602.09 3623.12,3602.09 3870.67,3354.54 U1.80@3870.67,3300.42
NetU1_83: U1.83 U5.1 | length 890
  Component Side w10: 3329,3789.3 3316.47,3776.77 3316.47,3663.25 3416.94,3562.78 3604.79,3562.78 3811.62,3355.95 U1.83@3811.62,3300.42 ; 3329.39,3789.93 3354.26,3814.79 U5.1@3399.88,3814.79
NetU5_2: U5.2 U5.3 | length 50.4
  Component Side w10: U5.3@3396.86,3714.84 U5.2@3396.86,3765.23
RS485_A: D14.2 D15.2 P1.21 R10.2 U5.6 | length 2598.8
  Component Side w10: 4296.1,3521.1 5773.78,3521.1 5882.46,3412.41 5972.31,3412.41 P1.21@6015.75,3455.85
  Component Side w15: U5.6@3613.75,3714.55 3641.63,3714.55 R10.2@3785.29,3570.89 ; R10.2@3792.34,3566.29 D14.2@3863.19,3566.29
  Component Side w20: D14.2@3876.98,3565.44 3876.98,3565.03 3926,3516.01 4298.36,3516.01
  Component Side w25: 4227.11,3517.64 D15.2@4227.11,3589.76
RS485_B: D14.1 D15.1 P1.4 R10.1 U5.7 | length 2454.5
  Component Side w10: 4303.23,3713.12 4473.54,3542.82 5811.41,3542.82 P1.4@5898.43,3455.8
  Component Side w15: U5.7@3607.29,3765.03 U5.7@3623.77,3765.03 ; U5.7@3623.77,3765.13 3654.04,3765.13 R10.1@3785.29,3633.89 ; R10.1@3785.17,3640.5 D14.1@3863.19,3640.5
  Component Side w20: D14.1@3869.36,3639.64 3942.84,3713.12 4227.11,3713.12
  Component Side w25: D15.1@4227.11,3659.02 4227.11,3713.12
SWCLK: DL.2 U1.76 | length 5124.8
  Component Side w10: DL.2@1906.14,2370.16 v1@2288.7,2370.16 ; v1@2328.22,1670.07 v1(4245.12,1670.07) ; U1.76@3949.41,3300.42 3949.41,3365.75 3985.28,3401.62 4068.84,3401.62 ; 4064.53,3401.64 v1@4244.43,3401.64
  Solder Side w10: v1@2288.9,2369.62 2328.3,2330.22 v1(2328.3,1671.14) ; v1@4244.92,1670.07 v1(4244.94,3400.98)
  other v1: 2288.65,2369.41
SWDIO: DL.3 DL.4 U1.72 | length 4634.6
  Component Side w10: DL.4@1882.33,2318.98 DL.3@1882.33,2344.57 ; DL.4@1903.49,2318.98 v1@2290.02,2318.98 ; v1@2287.93,1709.03 v1(4207.22,1709.03) ; U1.72@4020.12,3172.46 4179.36,3172.46 v1@4209.43,3202.54
  Solder Side w10: v1(2288.03,1708.18) v1@2288.03,2319.29 ; v1@4207.89,1711.84 v1(4207.89,3202.19)
  other v1: 2288.65,2318.95
pads on no net: DL.1 P2.1 P2.2 P2.15 P2.16 U1.2 U1.3 U1.4 U1.5 U1.7 U1.14 U1.15 U1.16 U1.17 U1.18 U1.23 U1.24 U1.42 U1.43 U1.44 U1.45 U1.46 U1.53 U1.54 U1.55 U1.56 U1.57 U1.58 U1.59 U1.60 U1.61 U1.62 U1.63 U1.64 U1.78 U1.79 U1.81 U1.82 U1.84 U1.85 U1.86 U1.87 U1.88 U1.89 U1.90 U1.91 U1.92 U1.93 U1.95 U1.96 U1.97 U1.98 U2.5 U3.5 U4.5 U7.2 U8.4 U9.4
copper on no net:
  other v1: -1954.88,5815.21 -1878.04,5815.21 -1954.88,5886.38 -1878.04,5886.38
  other v3: 1897.78,1538.08 6485.07,1538.08 1897.78,4458.4 6485.07,4458.4

## Polygon pours and split planes (outlines as drawn)
GND on Component Side "Component Side-GND" (solid, remove dead copper, pour order 11): 1705.42,1285.82 1705.42,4670.85 1705.44,4670.87 1705.77,4671.2 6732.82,4671.2 6732.82,1285.81
GND on Solder Side "Solder Side-GND" (solid, remove dead copper, pour order 13): 1705.42,1285.82 1705.42,4670.85 1705.44,4670.87 1705.77,4671.2 6732.82,4671.2 6732.82,1285.81
GND on Ground Plane (split plane): 6979.9,1020.1 1020.1,1020.1 1020.1,4979.9 6979.9,4979.9
D3V3 on Power Plane (split plane): 6979.9,1020.1 1020.1,1020.1 1020.1,4979.9 6979.9,4979.9

## Other copper
Component Side:
  rectangle net 24V: 4704.03,1622.14 4739.5,1656.82
  rectangle net 24V: 4712.3,1653.67 4763.28,1696.63
  rectangle net 24V: 4691.19,1693.24 4789.97,1742.63
  rectangle net 24V: 4641.39,1737.28 4822.91,1796.96
  rectangle net 24V: 4619.81,1788.39 4856.07,1800.6
  rectangle net NetF1_1: 5950.75,4117.33 6088.79,4333.21
  region net 24V: 5726.84,3949.94 5726.84,4493.01 5414.98,4493.01 5414.98,3949.94
  rectangle net 5V: 2565.19,2896.52 2743.12,2943.58
  rectangle net 5V: 2552.02,2774.9 2596.88,2944.08
  rectangle net 5V: 2551,3137.33 2595.86,3323.89
  rectangle net 5V: 2563.17,3276.96 2741.1,3324.02
  rectangle net CAN2_H: 5312.26,3363.71 5506.98,3387.47
  rectangle net CAN2_L: 5312.22,3288.95 5504.04,3312.61
  rectangle net CAN1_H: 5321.97,3739.5 5417.64,3763.27
  rectangle net CAN1_L: 5322.15,3664.71 5417.82,3688.48
  rectangle net CAN3_H: 5323.82,3077.72 5419.49,3101.48
  rectangle net CAN3_L: 5323.63,3002.67 5419.3,3026.44
  rectangle net 24V: 4354.82,3935.57 5829.12,4028.11
  rectangle net NetC30_2: 3648.06,4004.59 4052.47,4250.53
  rectangle net 5V: 2939.53,4303.19 4634.37,4554.84
  rectangle net D3V3: 2939.67,3923.68 3148.12,4084.96
  rectangle net BUS_24V: 5746.93,4118.88 5929.96,4493.52
  rectangle net 24V: 5630.56,3684.01 5846.61,4099.64
  rectangle net 24V: 5796.71,3855.69 5930.08,3923.28
  rectangle net 24V: 5795,3684.01 5928.36,3748.75
  rectangle net 24V: 4657.56,1414.99 4719.07,1910.27
  rectangle net 24V: 5409.69,1679.76 5584.07,1975.53
  rectangle net 24V: 4702.91,1853.91 5510.7,2049.78
  rectangle net NetD9_2: 5641.4,2173.24 5929.73,2320.83
  rectangle net 24V: 5563.96,1913.06 5930.15,1975.02
  rectangle net 24V: 5567.98,1738.47 5851.97,1961.61
  rectangle net NetD9_2: 5627.82,2049.76 5849.35,2387.99
  rectangle net 24V: 5313.61,2031.71 5510.65,2112.46
  region net RS485_B: 3918.45,3702.89 3976.66,3761.1 4262.38,3761.1 4320.55,3702.92
  region net RS485_A: 3911.46,3516.83 3970.02,3458.32 4249.62,3458.32 4313.14,3516.83
  region net 24V: 4355.4,4028.79 4355.4,4028.73 4304.48,3977.81 4346.01,3936.29 4355.42,3936.29
Solder Side:
  rectangle net 5V: 2698.7,1949.56 2815.47,2090.87
  rectangle net 5V: 2550.37,1949.14 2742.26,4555.13
  rectangle net 5V: 2661.58,4303.42 3092.52,4555.21
  rectangle net 24V: 4701.26,1794.47 4855.83,4029.43
Power Plane (plane layer: these items are gaps in the copper):
  lines w20: 3124.68,3644.08 3132.63,3652.02

## Silkscreen, mask and mechanical layers (free items; w line width, h text height)
Top Overlay:
  text "KSHINE" at 2349.49,1480.67 h200
  text "SensorFusion_V1.2_08102018" at 2056.45,1382.87 h60
Mechanical 1:
  lines w10: 6736.87,1280.62 1700.37,1280.62 1700.37,4675.88 6737.5,4675.88 6737.5,1280.38

## Dimensions
6826.96,1276.73 to 6871.64,4674.24 on Top Overlay
1697.93,1150.45 to 6733.97,1146.81 on Top Overlay